# Altium PCB Driver_Modulation.PcbDoc
Units mm, origin at the board's own origin, x right, y up, seen from the top; angles counter-clockwise.
Board outline 152.4 x 101.6 mm, 4 copper layers (Top Layer, Layer 1, Layer 2, Bottom Layer), stack 1.57 mm thick; 114 components, 58 nets, 290 pads, 0 vias.
Unrouted connection lines stored in the file: 153.
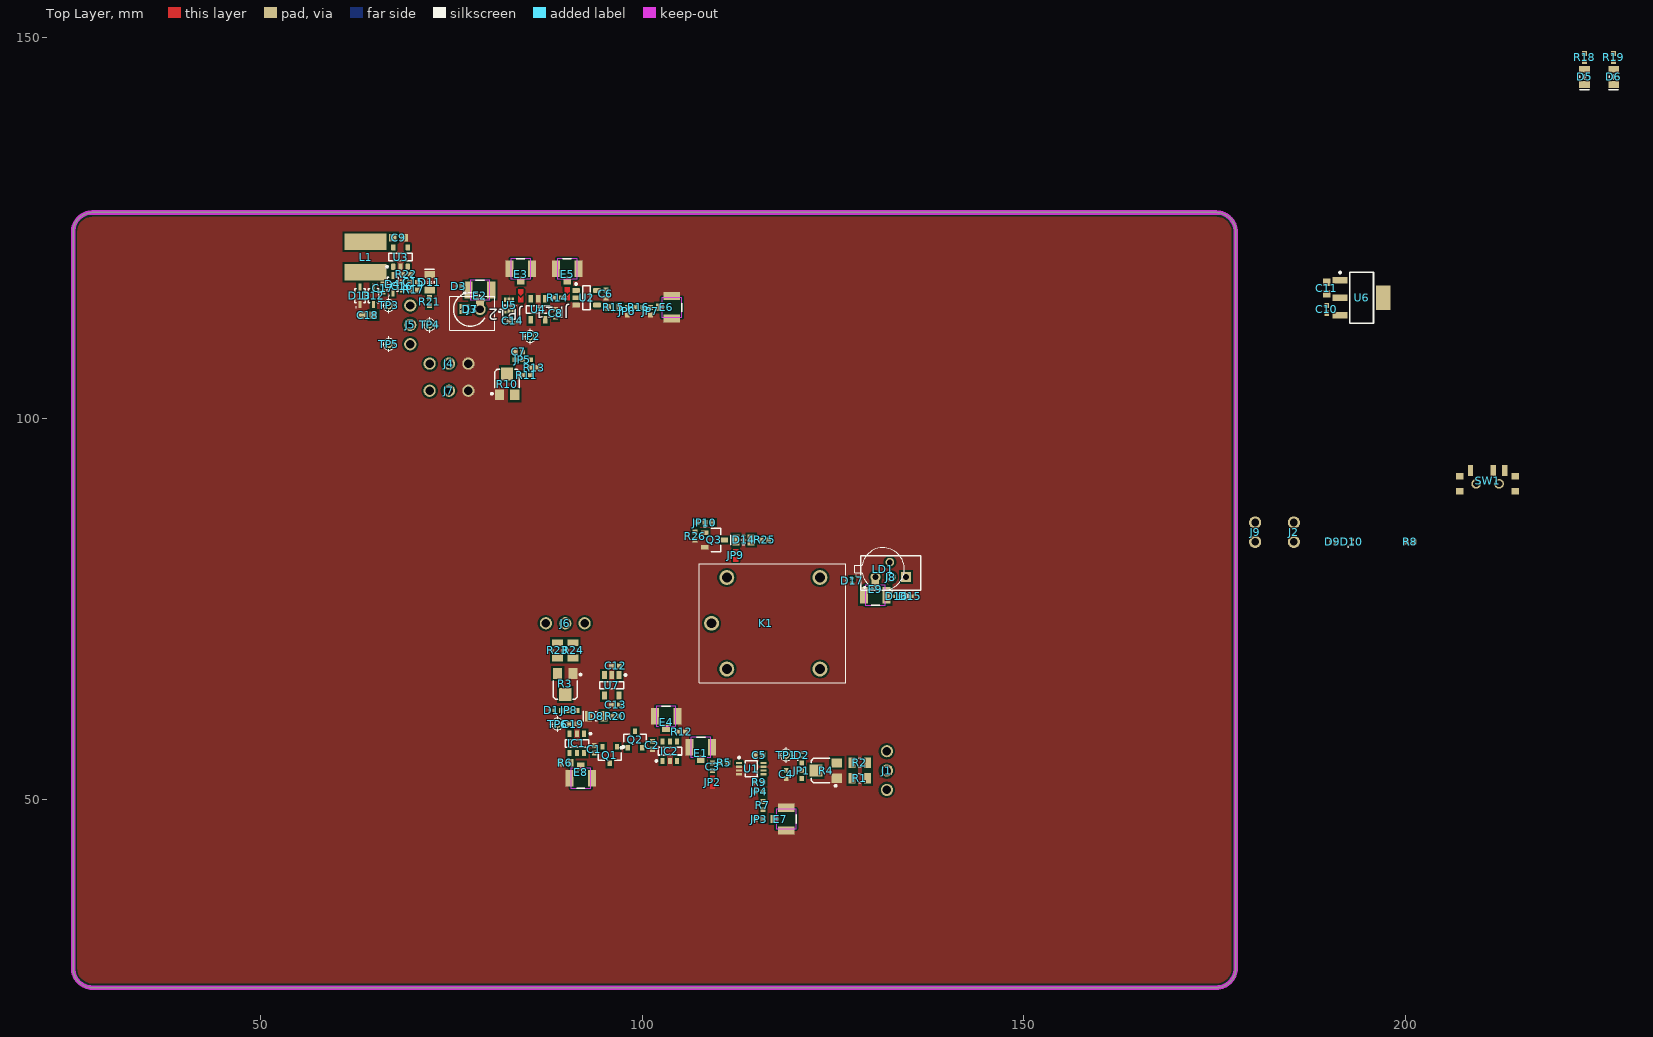
[diagram p0: Top Layer view]
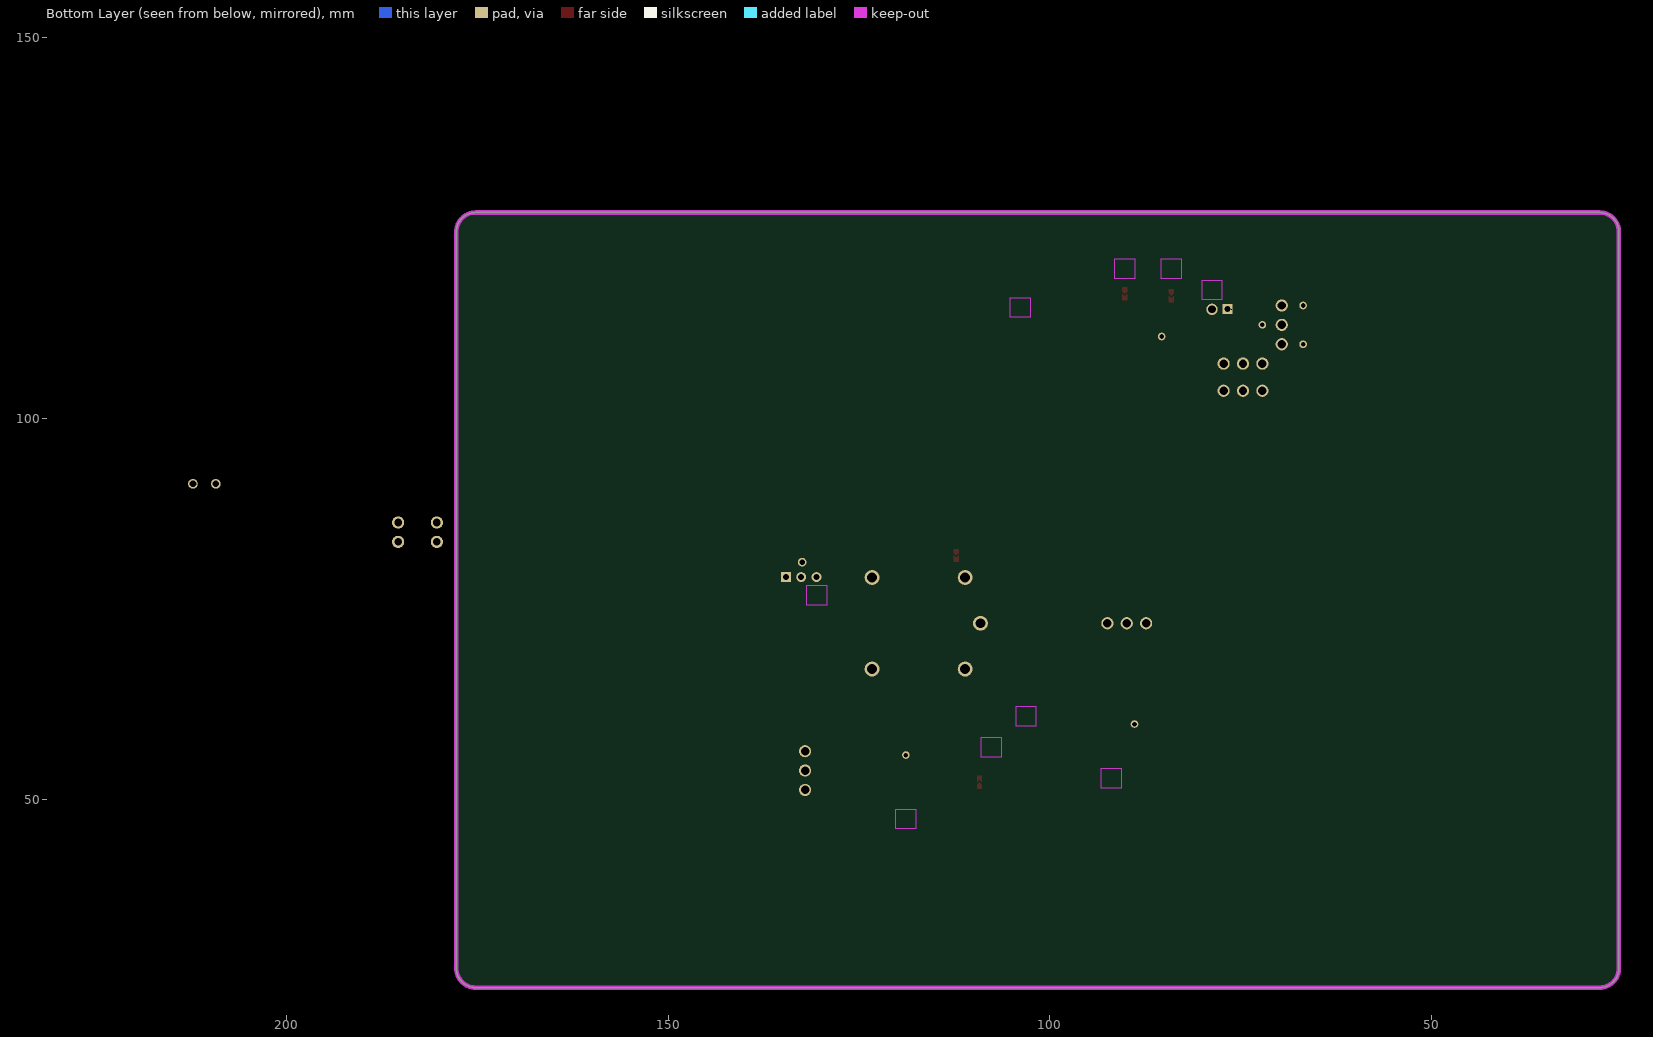
[diagram p1: Bottom Layer view, seen from below]
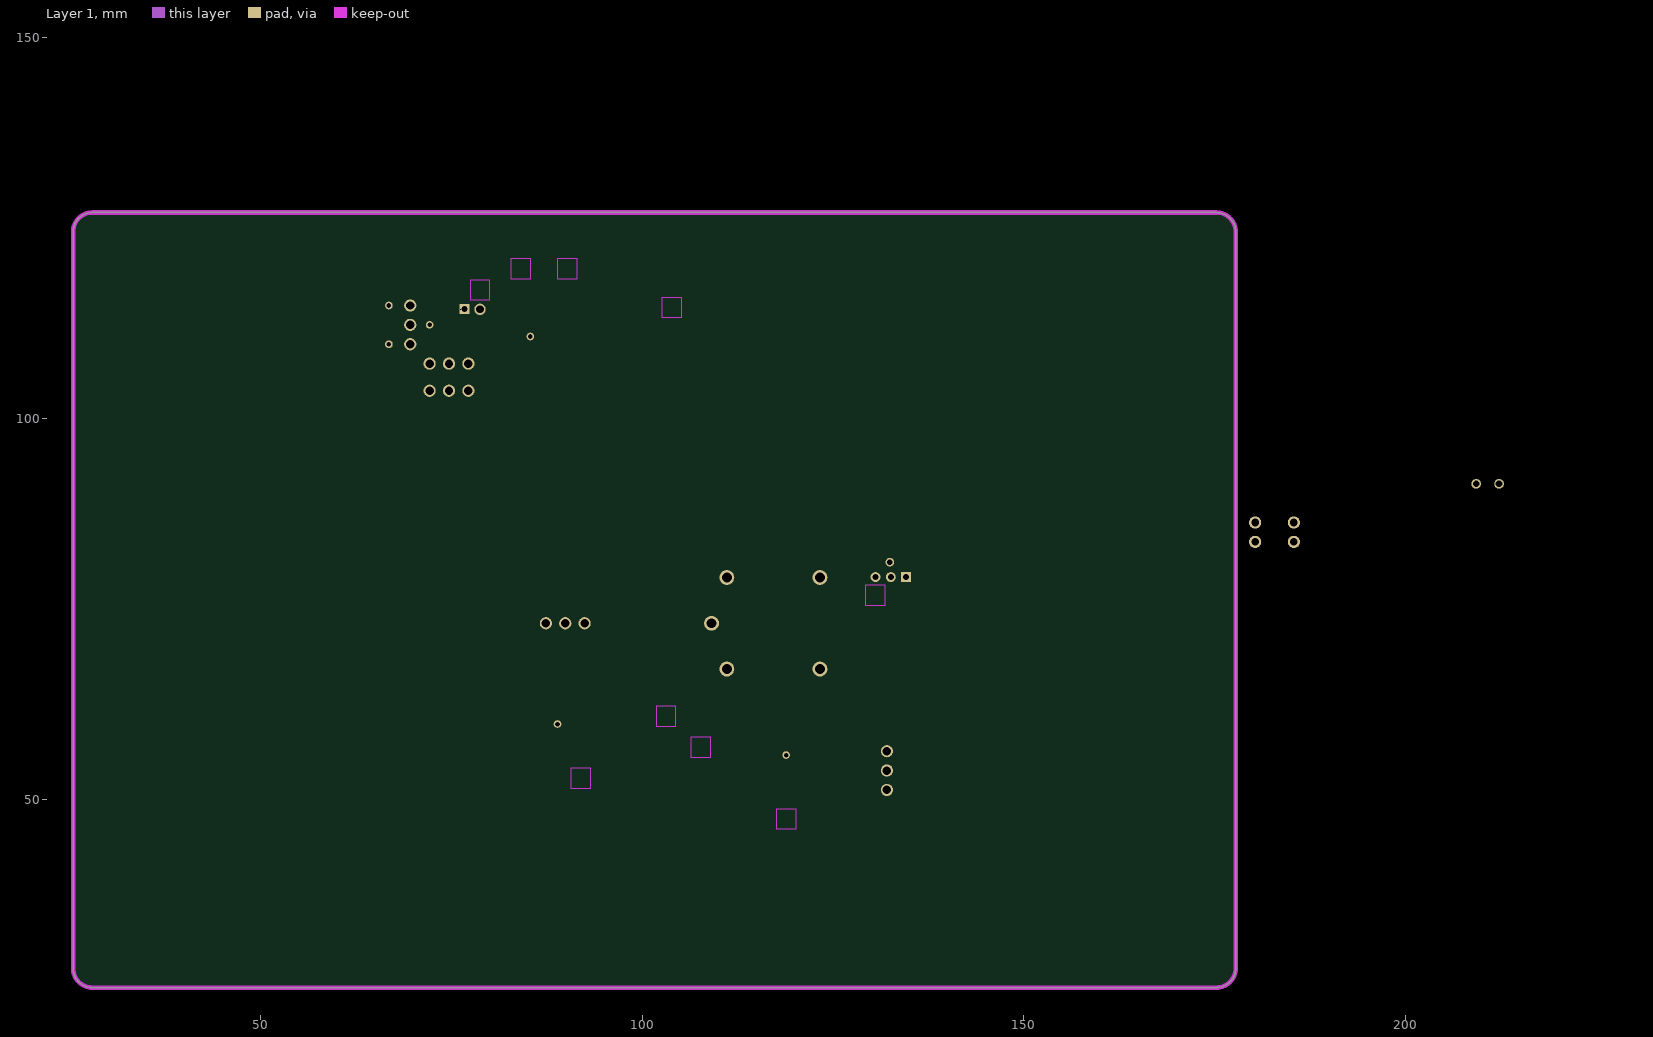
[diagram p2: Layer 1]
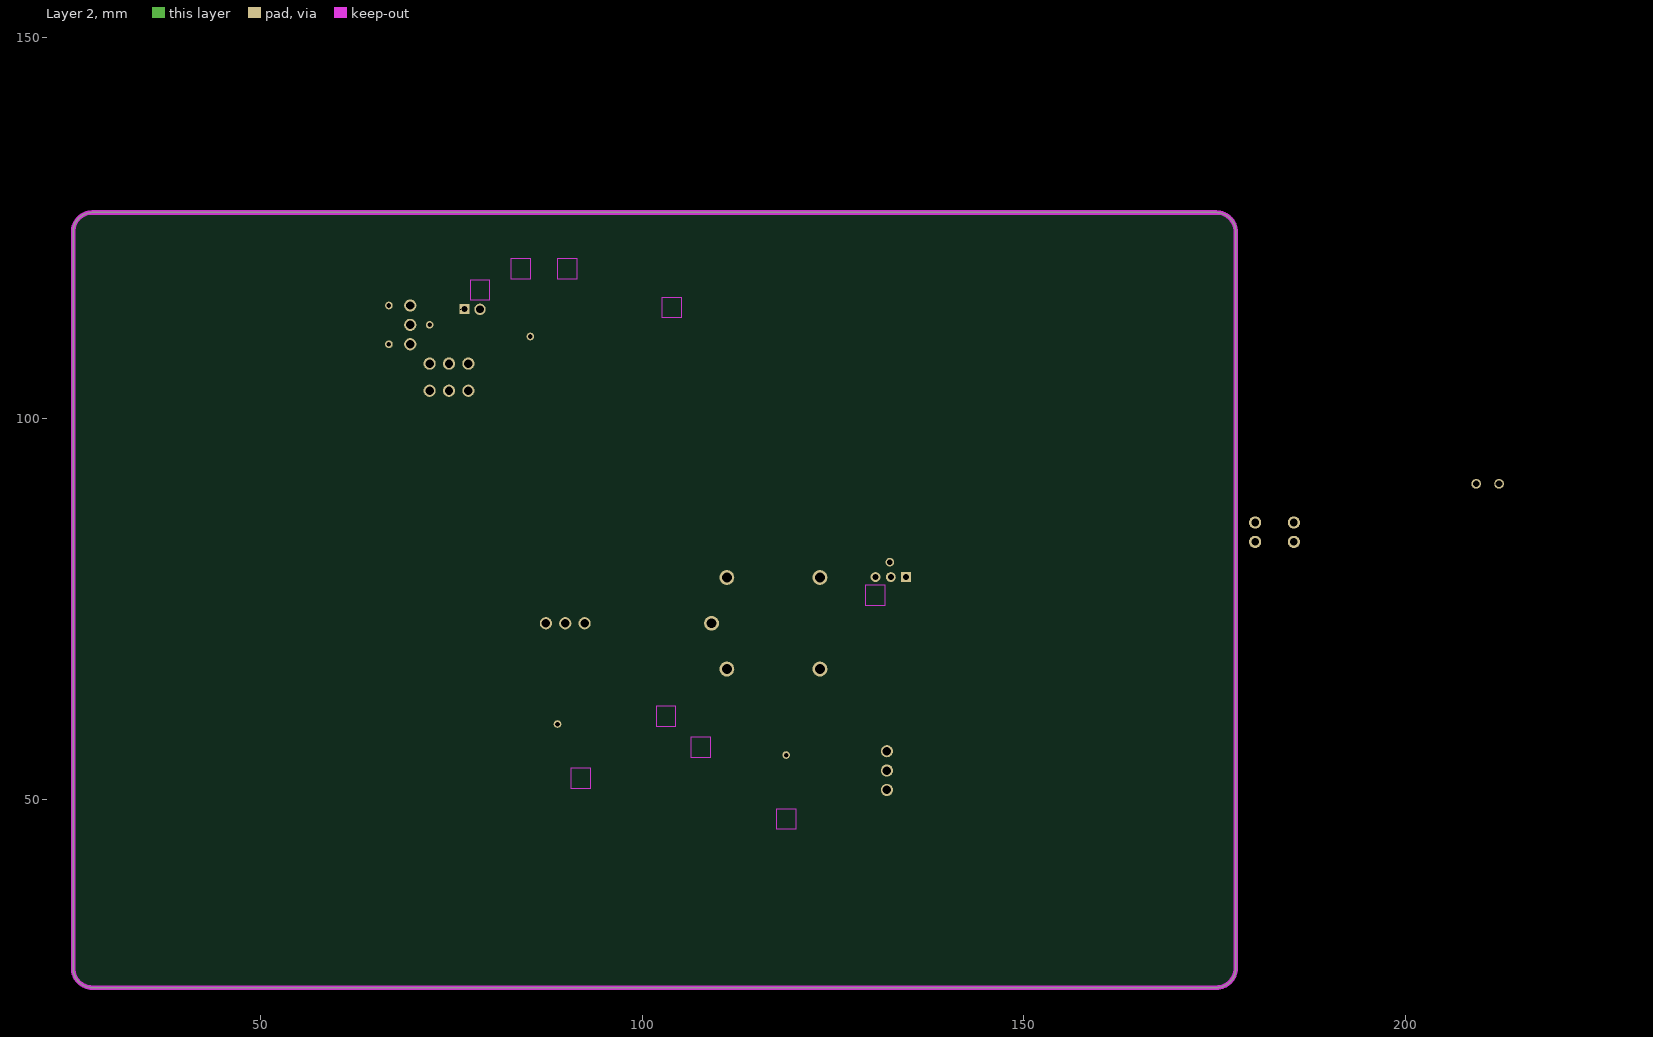
[diagram p3: Layer 2]

## Layer stack, top to bottom
Top Solder: solder mask 0.0203, Polyester, Dk 3.8
Top Layer: signal copper 0.035
Dielectric 2: prepreg 0.2, 7628, Dk 4.6
Layer 1: signal copper 0.0175
Dielectric 1: core 1.065, FR-4, Dk 4.35
Layer 2: signal copper 0.0175
Dielectric 3: prepreg 0.2, 7628, Dk 4.6
Bottom Layer: signal copper 0.035
Bottom Solder: solder mask 0.0203, Polyester, Dk 3.8

## Board outline
25.4,27.94 25.4,124.46 cw(c27.94,124.46) 27.94,127 175.26,127 cw(c175.26,124.46) 177.8,124.46 177.8,27.94 cw(c175.26,27.94) 175.26,25.4 27.94,25.4 cw(c27.94,27.94)

## Design rules (kind name [scope] priority, off if disabled: settings)
Clearance [All] p1: gap=0.254 ignorepadtopadclearanceinfootprint=TRUE except(0: Arc-Hole Track-Hole SMDPad-Hole THPad-Hole Via-Hole Fill-Hole Poly-Hole Region-Hole Text-Hole; 0.127: Arc-Arc Arc-Track Arc-SMDPad Track-Track Track-SMDPad SMDPad-SMDPad)
HoleSize [All] p1: absolutevalues=TRUE maxlimit=6.3 minlimit=0.3 maxpercent=80.000 minpercent=20.000
PlaneConnect [All] p1: planeconnectstyle=Direct reliefexpansion=0.508 reliefentries=4 reliefconductorwidth=0.254 reliefairgap=0.254
PolygonConnect [All] p1: connectstyle=Direct reliefconductorwidth=0.254 reliefentries=4 polygonreliefangle="90 Angle" airgapwidth=0.254
RoutingVias [All] p1: holewidth=0.3 width=0.45 viastyle="Through Hole" minholewidth=0.3 minwidth=0.45 maxholewidth=0.711 maxwidth=1.27
SolderMaskExpansion [All] p1: expansion=0.102 istentingtop=FALSE
SupplyNets "Schematic Supply Nets_16" [InNet('LD_A] p1: voltage=0.000
SupplyNets "Schematic Supply Nets_15" [InNet('LD_A] p2: voltage=0.000
SupplyNets "Schematic Supply Nets_14" [InNet('LD_A] p3: voltage=0.000
SupplyNets "Schematic Supply Nets_13" [InNet('LD_A] p4: voltage=0.000
SupplyNets "Schematic Supply Nets_12" [InNet('LD_A] p5: voltage=0.000
SupplyNets "Schematic Supply Nets_11" [InNet('LD_A] p6: voltage=0.000
SupplyNets "Schematic Supply Nets_10" [InNet('LD_A] p7: voltage=0.000
SupplyNets "Schematic Supply Nets_9" [InNet('LD_A] p8: voltage=0.000
SupplyNets "Schematic Supply Nets_8" [InNet('LD_A] p9: voltage=0.000
SupplyNets "Schematic Supply Nets_7" [InNet('LD_A] p10: voltage=0.000
SupplyNets "Schematic Supply Nets_6" [InNet('GND')] p11: voltage=0.000
SupplyNets "Schematic Supply Nets_5" [InNet('PD_BIAS')] p12: voltage=0.000
SupplyNets "Schematic Supply Nets_4" [InNet('3V3')] p13: voltage=0.000
SupplyNets "Schematic Supply Nets_3" [InNet('LD_A] p14: voltage=0.000
SupplyNets "Schematic Supply Nets_2" [InNet('2V7')] p15: voltage=0.000
SupplyNets "Schematic Supply Nets_1" [InNet('+13V')] p16: voltage=0.000
SupplyNets "Schematic Supply Nets" [InNet('-13V')] p17: voltage=0.000
Width [All] p1: maxlimit=10 minlimit=0.127 preferedwidth=0.2
28 further rules are at their usual default settings.

## Classes and differential pairs
component class U_Alignment_driver: D9 D10 J2 J9 R8 SW1
net class 50R_TRANS: NetJP6_2 NetJP11_2 NetR14_1 NetR15_1
component class U_Power_Regulation: C9 C10 C11 C12 C13 C15 C16 C17 C18 D4 D5 D6 D8 D11 D12 D13 J5 L1 R17 R18 R19 R20 R21 R22 TP3 TP4 TP5 U3 U6 U7
component class U_PD_Receiver_Circuit: C6 C7 C8 C14 D3 D7 E2 E3 E5 J3 J4 J7 JP5 JP6 JP7 JP11 JP12 R10 R11 R13 R14 R15 R16 TP2 U2 U4 U5
component class U_laser: D14 D15 D16 D17 E9 J8 JP9 JP10 K1 LD1 Q3 R25 R26
component class U_Driver_Modulation: C2 C3 C4 C5 D2 E1 E4 IC2 J1 JP1 JP2 JP3 JP4 Q2 R1 R2 R4 R5 R7 R9 R12 TP1 U1
component class U_bias: C1 C19 D1 E8 IC1 J6 JP8 Q1 R3 R6 R23 R24 TP6
component class ROOT: E6 E7

## Components (designator, comment, footprint, x,y, rotation, side; value= is the part's Value field where it differs from the comment)
C1 "CL05B104KB54PNC" CAPC1005X06N 93.726,56.642 r270 top value=100nF
C2 "CL05B104KB54PNC" CAPC1005X06N 101.346,57.15 r90 top value=100nF
C3 "GCM1555C1H1R0JA16D" CAPC1005X06N 109.22,54.356 r90 top value=1pF
C4 "CL05A105KA5NQNC" CAPC1005X06N 118.872,53.34 r90 top value=1µF
C5 "CL05B104KB54PNC" CAPC1005X06N 115.316,55.88 r0 top value=100nF
C6 "CL05B104KB54PNC" CAPC1005X06N 95.25,116.332 r90 top value=100nF
C7 "CL05A105KA5NQNC" CAPC1005X06N 83.82,108.712 r0 top value=1µF
C8 "CL05B104KB54PNC" CAPC1005X06N 88.646,113.792 r270 top value=100nF
C9 "C0603C475K9PACTU" CAPC1608X10N 68.072,123.698 r180 top value=4.7µF
C10 "CL05A106MQ5NUNC" CAPC1005X06N 189.738,114.3 r270 top value=10µF
C11 "CL10A226MQ8NRNC" CAPC1608X10N 189.738,117.094 r270 top value=22µF
C12 "CL05A105KA5NQNC" CAPC1005X06N 96.52,67.564 r0 top value=1µF
C13 "CL05A105KA5NQNC" CAPC1005X06N 96.52,62.484 r0 top value=1µF
C14 "CL05B104KB54PNC" CAPC1005X06N 83.058,112.776 r180 top value=100nF
C15 "CL05C100JB5NNNC" CAPC1005X06N 70.028,117.856 r180 top value=10pF
C16 "CL05A105KA5NQNC" CAPC1005X06N 68.58,117.348 r270 top value=1µF
C17 "CL05A105KA5NQNC" CAPC1005X06N 66.04,117.094 r90 top value=1µF
C18 "CL10A475KO8NNNC" CAPC1608X10N 64.008,113.538 r0 top value=4.7µF
C19 "CL05A105KA5NQNC" CAPC1005X06N 90.932,59.944 r180 top value=1µF
D1 "H5VU10U" DFN60P100X45-2L 88.138,61.722 r180 top value=5V
D2 "H5VU10U" DFN60P100X45-2L 120.904,55.88 r90 top value=5V
D3 "H5VU10U" DFN60P100X45-2L 75.946,117.348 r180 top value=5V
D4 "1N5819WS" SODFL250X100-2N 67.31,117.602 r90 top
D5 "KT-0805Y" LED_0805 223.52,144.78 r90 top
D6 "KT-0805Y" LED_0805 227.33,144.78 r90 top
D7 "SFH 203 P" SFH203P 77.47,114.3 r180 top
D8 "KT-0805Y" LED_0805 93.98,60.96 r0 top
D9 "H5VU10U" DFN60P100X45-2L 190.5,83.82 r0 top value=5V
D10 "H5VU10U" DFN60P100X45-2L 193.04,83.82 r90 top value=5V
D11 "KT-0805Y" LED_0805 72.136,117.856 r270 top
D12 "1N5819WS" SODFL250X100-2N 64.77,116.078 r270 top
D13 "1N5819WS" SODFL250X100-2N 62.992,116.078 r90 top
D14 "KT-0805G" LED_0805 113.284,84.074 r0 top
D15 "H5VU10U" DFN60P100X45-2L 135.128,76.708 r0 top value=5V
D16 "H5VU10U" DFN60P100X45-2L 133.35,76.708 r0 top value=5V
D17 "H5VU10U" DFN60P100X45-2L 127.508,78.74 r270 top value=5V
E1 "U.FL-R-SMT-1(01)" "HRS-U.FL-R-SMT-3_V 4_LAYER_KO" 107.696,56.896 r0 top
E2 "U.FL-R-SMT-1(01)" "HRS-U.FL-R-SMT-3_V 4_LAYER_KO" 78.74,116.84 r0 top
E3 "U.FL-R-SMT-1(01)" "HRS-U.FL-R-SMT-3_V 4_LAYER_KO" 84.074,119.634 r0 top
E4 "U.FL-R-SMT-1(01)" "HRS-U.FL-R-SMT-3_V 4_LAYER_KO" 103.124,60.96 r0 top
E5 "U.FL-R-SMT-1(01)" "HRS-U.FL-R-SMT-3_V 4_LAYER_KO" 90.17,119.634 r0 top
E6 "U.FL-R-SMT-1(01)" "HRS-U.FL-R-SMT-3_V 4_LAYER_KO" 103.886,114.554 r270 top
E7 "U.FL-R-SMT-1(01)" "HRS-U.FL-R-SMT-3_V 4_LAYER_KO" 118.872,47.498 r270 top
E8 "U.FL-R-SMT-1(01)" "HRS-U.FL-R-SMT-3_V 4_LAYER_KO" 91.948,52.832 r180 top
E9 "U.FL-R-SMT-1(01)" "HRS-U.FL-R-SMT-3_V 4_LAYER_KO" 130.556,76.835 r180 top
IC1 "OPA355NA/3K" DBV0006A_SOT-23-6_TI__SOT95P280X145-6L 91.44,57.404 r270 top
IC2 "OPA355NA/3K" DBV0006A_SOT-23-6_TI__SOT95P280X145-6L 103.632,56.388 r90 top
J1 "10129378-903001BLF" 10129378-903001BLF-Footprint-1 132.08,51.308 r90 top
J2 "Alt. Switch Connection" 22-28-4020-Footprint-1 185.42,83.82 r90 top
J3 "B2B-PH-K-S(LF)(SN)" JST_B2B-PH-K-S(LF)(SN) 77.724,113.792 r180 top
J4 "10129378-903001BLF" 10129378-903001BLF-Footprint-1 77.216,107.188 r180 top
J5 "10129378-903001BLF" 10129378-903001BLF-Footprint-1 69.596,109.728 r90 top
J6 "10129378-903001BLF" 10129378-903001BLF-Footprint-1 87.376,73.152 r0 top
J7 "10129378-903001BLF" 10129378-903001BLF-Footprint-1 77.216,103.632 r180 top
J8 "B3B-PH-K-S(LF)(SN)" JST-B3B-PH-K-S-3_V 132.588,79.756 r180 top
J9 "LD Connection" 22-28-4020-Footprint-1 180.34,83.82 r90 top
JP1 "JUMPER-0402 TWO STATE" "RESC1005X04N TWO STATE" 120.904,54.356 r90 top value=0
JP2 "JUMPER-0402" JUMPER-0402-Footprint-1 109.22,52.324 r90 top value=0
JP3 "JUMPER-0402" RESC1005X04N 115.316,47.498 r0 top value=0
JP4 "JUMPER-0402" RESC1005X04N 115.316,51.054 r0 top value=0
JP5 "JUMPER-0402 TWO STATE" "RESC1005X04N TWO STATE" 84.836,107.696 r0 top value=0
JP6 "JUMPER-0402" RESC1005X04N 98.044,114.046 r90 top value=0
JP7 "JUMPER-0402" RESC1005X04N 101.092,114.046 r90 top value=0
JP8 "JUMPER-0402 TWO STATE" "RESC1005X04N TWO STATE" 89.916,61.722 r180 top value=0
JP9 "ERJ-2GE0R00X" JUMPER_RESC1005X04N 112.268,82.042 r270 top value=0
JP10 "JUMPER-0402 TWO STATE" "RESC1005X04N TWO STATE" 108.712,86.36 r0 top value=0
JP11 "JUMPER-0402" JUMPER-0402-Footprint-1 90.17,116.332 r270 top value=0
JP12 "JUMPER-0402" JUMPER-0402-Footprint-1 84.074,116.078 r270 top value=0
K1 "SRD-03VDC-SL-C" SRD-03VDC-SL-C-Footprint-1 117.094,73.152 r0 top
L1 "PCD0504MT470" INDP5252X48L 63.754,121.158 r270 top value=47µH
LD1 "OPV314Y" TO-18 131.572,80.264 r45 top
Q1 "2SC3356" SOT-23_hongjiacheng__SOT95P240X115-3L 95.758,55.88 r270 top
Q2 "2SC3356" SOT-23_hongjiacheng__SOT95P240X115-3L 99.06,57.912 r90 top
Q3 "MDD2302" SOT95P252X140-3N 109.474,84.074 r0 top
R1 "0805W8F7502T5E" RESC2012X05N 128.524,52.832 r0 top value=75k
R2 "0805W8F7501T5E" RESC2012X05N 128.524,54.864 r0 top value=7.5k
R3 "TC33X-2-103E" BOUR-TC33X-2_V 89.916,65.024 r270 top value=10k
R4 "TC33X-2-103E" BOUR-TC33X-2_V 123.952,53.848 r180 top value=10k
R5 "0402WGF0000TCE" RESC1005X04N 110.744,54.864 r0 top value=0
R6 "ERJ-3GEYJ270V" RESC1608X05N 89.916,54.864 r0 top value=27
R7 "0402WGF0000TCE" RESC1005X04N 115.824,49.276 r270 top value=0
R8 "0402WGF1000TCE" RESC1005X04N 200.66,83.82 r0 top value=100
R9 "0402WGF499JTCE" RESC1005X04N 115.316,52.324 r0 top value=49.9
R10 "TC33X-2-103E" BOUR-TC33X-2_V 82.296,104.648 r90 top value=10k
R11 "0402WGF2702TCE" RESC1005X04N 84.836,105.664 r180 top value=27k
R12 "0402WGF1000TCE" RESC1005X04N 105.156,58.928 r180 top value=100
R13 "0402WGF5601TCE" RESC1005X04N 85.852,106.68 r180 top value=5.6k
R14 "0402WGF499JTCE" RESC1005X04N 88.9,115.824 r0 top value=49.9
R15 "0603WAF200JT5E" RESC1608X05N 96.266,114.554 r0 top value=20
R16 "0402WGF0000TCE" RESC1005X04N 99.568,114.554 r180 top value=0
R17 "0402WGF1004TCE" RESC1005X04N 70.028,116.84 r0 top value=1M
R18 "0402WGF5101TCE" RESC1005X04N 223.52,147.32 r90 top value=5.1k
R19 "CRCW04021K00FKEDC" RESC1005X04N 227.33,147.32 r90 top value=1k
R20 "CRCW04021K00FKEDC" RESC1005X04N 96.52,60.96 r0 top value=1k
R21 "CRCW0402-10K0FKED" RESC1005X04N 72.136,115.316 r270 top value=10k
R22 "CRCW0402100KFKEDC" RESC1005X04N 69.088,118.872 r180 top value=100k
R23 "0805W8F1503T5E" RESC2012X05N 88.9,69.596 r90 top value=150k
R24 "0805W8F1002T5E" RESC2012X05N 90.932,69.596 r90 top value=10k
R25 "CRCW04021K00FKEDC" RESC1005X04N 116.078,84.074 r0 top value=1k
R26 "CRCW0402100KFKEDC" RESC1005X04N 106.934,84.582 r90 top value=100k
SW1 "PCM12SMTR" PCM12SMTR-Footprint-1 210.82,91.44 r0 top
TP1 "Test Point" "Test Point-Footprint-1" 118.872,55.88 r0 top
TP2 "Test Point" "Test Point-Footprint-1" 85.344,110.744 r90 top
TP3 "Test Point" "Test Point-Footprint-1" 66.802,114.808 r90 top
TP4 "Test Point" "Test Point-Footprint-1" 72.136,112.268 r90 top
TP5 "Test Point" "Test Point-Footprint-1" 66.802,109.728 r90 top
TP6 "Test Point" "Test Point-Footprint-1" 88.9,59.944 r0 top
U1 "SN74AUC2G53DCUR" DCU0008A_N 114.3,54.102 r0 top value=15Ω
U2 "SN74LVC1G14DBVR" DBV0005A_N 92.71,115.824 r0 top
U3 "TPS61040DBVR" DBV0005A_L 68.326,121.158 r90 top
U4 "TLV3601DCKR" SOT95P280X145-5N 86.36,114.3 r270 top
U5 "LMH34400IDRLR" SOTFL50P160X60-6N 82.55,114.808 r90 top
U6 "AMS1117-3.3" 1117_REG_SOT223__SOT230P700X180-4L 194.31,115.824 r0 top
U7 "NCP114ASN270T1G" SOT95P280X110-5N 96.012,65.024 r270 top

## Footprints (in the part's own frame and the unit in brackets; to place one, negate y for a bottom-side part, rotate by r counter-clockwise, add the part's x,y. Pads: shape width x height; smd on the part's side, far side on the other; paste and mask are expansions set on the pad)
22-28-4020-Footprint-1 [mm]
  round 1.6 hole 1: 1(0,0) 2(2.54,0)
  body extent -1.27,-1.27 3.81,1.23, height 8.38
1117_REG_SOT223__SOT230P700X180-4L [mm] "SOT223 for AMS/NCP/TLV1117x regulators SOT223, 4-Leads, Body 6.50x7.00mm (avg), Pitch 2.30mm, IPC High Density"
  rect 1.95x0.9 smd: 1(-2.825,2.3) 2(-2.825,0) 3(-2.825,-2.3)
  rect 1.95x3.2 smd: 4(2.825,0)
  silkscreen extent -2.95,-3.35 1.55,3.42, body extent -3.5,-3.35 3.5,3.35, height 1.8
10129378-903001BLF-Footprint-1 [mm]
  round 1.6 hole 1.1: 1(0,0) 2(2.54,0) 3(5.08,0)
  body extent -1.27,-1.23 6.35,1.27, height 8.38
BOUR-TC33X-2_V [mm] "SMD, 3-Leads, Body 3.8x3.6mm"
  rect 1.4x1.2 smd: 1(-1.55,1) 3(-1.55,-1)
  rect 1.7x1.6 smd: 2(1.2,0)
  silkscreen extent -1.52,-1.6 1.8,2.13, body extent -2.01,-1.5 1.8,1.5, height 1.21
CAPC1005X06N [mm] "Chip Capacitor, 2-Leads, Body 1.00x0.50mm, IPC Medium Density"
  rect 0.66x0.62 smd: 1(-0.508,0) 2(0.508,0)
  body extent -0.53,-0.28 0.53,0.28, height 0.55
CAPC1608X10N [mm] "Chip Capacitor, 2-Leads, Body 1.60x0.80mm, IPC Medium Density"
  rect 1x1 smd: 1(-0.75,0) 2(0.75,0)
  body extent -0.87,-0.48 0.87,0.48, height 0.95
DBV0005A_L [mm] "SOT23, 5-Leads, Body 3.05x1.75mm, Pitch 0.95mm, IPC High Density"
  rrect18% 0.8x0.55 smd: 1(-1.275,0.95) 2(-1.275,0) 3(-1.275,-0.95) 4(1.275,-0.95) 5(1.275,0.95)
  silkscreen extent -1.4,-1.55 0.5,1.9, body extent -1.42,-1.46 1.42,1.46, height 1.08
DBV0005A_N [mm] "SOT23, 5-Leads, Body 3.05x1.75mm, Pitch 0.95mm, IPC Medium Density"
  rrect17% 1x0.6 smd: 1(-1.375,0.95) 2(-1.375,0) 3(-1.375,-0.95) 4(1.375,-0.95) 5(1.375,0.95)
  silkscreen extent -1.5,-1.55 0.5,1.92, body extent -1.42,-1.46 1.42,1.46, height 1.08
DBV0006A_SOT-23-6_TI__SOT95P280X145-6L [mm] "SOT23, 6-Leads, Body 2.90x2.80mm, Pitch 0.95mm, IPC High Density"
  rect 0.8x0.55 smd: 1(-1.275,0.95) 2(-1.275,0) 3(-1.275,-0.95) 4(1.275,-0.95) 5(1.275,0) 6(1.275,0.95)
  silkscreen extent -1.4,-1.55 0.5,1.9, body extent -1.5,-1.53 1.5,1.53, height 1.45
DCU0008A_N [mm] "SOP, 8-Leads, Body 2.4x2.1mm, Pitch 0.5mm, IPC Medium Density"
  rrect33% 0.8x0.3 smd: 1(-1.6,0.75) 2(-1.6,0.25) 3(-1.6,-0.25) 4(-1.6,-0.75) 5(1.6,-0.75) 6(1.6,-0.25) 7(1.6,0.25) 8(1.6,0.75)
  silkscreen extent -1.72,-1.05 0.8,1.57, body extent -1.56,-1 1.56,1, height 0.9
DFN60P100X45-2L [mm] "DFN, 2-Leads, Body 0.60x1.00mm, Pitch 0.60mm, IPC High Density"
  rect 0.35x0.5 smd: 1(-0.3,0) 2(0.3,0)
  silkscreen extent -0.68,0.46 -0.59,0.56, body extent -0.53,-0.33 0.53,0.33, height 0.45
"HRS-U.FL-R-SMT-3_V 4_LAYER_KO" [mm] "SMT, 3-Leads, Body 2.6x2.6mm 4_LAYER_KO"
  rect 1x1.05 smd: 1(0,-1.525)
  rect 1.05x2.2 smd: 2(-1.475,0) 2(1.475,0)
  Top Layer keep-out region: -1.3,-1.3 1.3,-1.3 1.3,1.3 -1.3,1.3
  Layer 1 keep-out region: -1.3,-1.3 1.3,-1.3 1.3,1.3 -1.3,1.3
  Layer 2 keep-out region: -1.3,-1.3 1.3,-1.3 1.3,1.3 -1.3,1.3
  Bottom Layer keep-out region: -1.3,-1.3 1.3,-1.3 1.3,1.3 -1.3,1.3
  silkscreen extent -0.55,1.3 0.55,1.3, body extent -1.5,-1.5 1.5,1.3, height 1.24
INDP5252X48L [mm] "Precision Wire Wound Inductor, 2-Leads, Body 5.20x5.20mm, IPC High Density"
  rect 2.15x5.5 smd: 1(-2,0) 2(2,0)
  body extent -2.7,-2.6 2.7,2.6, height 4.9
JST-B3B-PH-K-S-3_V [mm] "Connector, 3-Leads, Body 7.9x4.5mm, Pitch 2mm"
  rect 1.3x1.3 hole 0.8: 1(-2,0.55)
  round 1.3 hole 0.8: 2(0,0.55) 3(2,0.55)
  silkscreen extent -3.95,-2.25 3.95,3.4, body extent -3.95,-2.25 3.95,2.25, height 6
JST_B2B-PH-K-S(LF)(SN) [mm]
  rect 1.308x1.308 hole 0.8: 1(1,-0.55)
  round 1.308 hole 0.8: 2(-1,-0.55)
  silkscreen extent -2.95,-2.77 2.95,2.25, body extent -2.95,-2.25 2.95,2.25, height 6
JUMPER-0402-Footprint-1 [mil]
  round 1 smd paste-99999 mask+0: 1(-16.5,0) 2(16.4,0)
  Top Layer region: -0.2,-12.2 33,-12.2 33,12.2 -0.2,12.2 12,0
  Top Layer region: -32.99,-12.2 -32.99,12.2 -12.2,12.2 0,0 -12.2,-12.2
  body extent -21,-11 21,11, height 16
JUMPER_RESC1005X04N [mil] "Chip Resistor, 2-Leads, Body 1.00x0.50mm, IPC Medium Density"
  round 1 smd paste-99999 mask+0: 1(-16.5,0) 2(16.4,0)
  Top Layer region: -32.99,-12.2 -32.99,12.2 -12.2,12.2 0,0 -12.2,-12.2
  Top Layer region: -0.2,-12.2 33,-12.2 33,12.2 -0.2,12.2 12,0
  body extent -21,-11 21,11, height 16
LED_0805 [mm] "Chip LED, 2-Leads, Body 0805, IPC Medium Density"
  rect 0.9x1.4 smd: 1(-1,0) 2(1,0)
  silkscreen extent -1.7,-0.64 0.35,0.63, body extent -1,-0.63 1,0.63, height 0.71
PCM12SMTR-Footprint-1 [mil]
  rect 39x32 smd: 0(-143.5,-38.5) 0(-143.5,38.5) 0(143.5,-38.5) 0(143.5,38.5)
  round 50 hole 35: 0(-59,0) 0(59,0)
  rect 28x59 smd: 1(-88.5,68.5) 2(29.5,68.5) 3(88.5,68.5)
  body extent -145,-92 145,88, height 55
RESC1005X04N [mm] "Chip Resistor, 2-Leads, Body 1.00x0.50mm, IPC Medium Density"
  rect 0.66x0.62 smd: 1(-0.508,0) 2(0.508,0)
  body extent -0.53,-0.28 0.53,0.28, height 0.4
"RESC1005X04N TWO STATE" [mm] "Chip Resistor, 2-Leads, Body 1.00x0.50mm, IPC Medium Density"
  rect 0.66x0.62 smd: 1(-1.524,0) 2(0.508,0) 3(-0.508,0)
  body extent -1.54,-0.28 0.53,0.28, height 0.4
RESC1608X05N [mm] "Chip Resistor, 2-Leads, Body 1.58x0.85mm, IPC Medium Density"
  rect 0.7x0.95 smd: 1(-0.7,0) 2(0.7,0)
  body extent -0.82,-0.48 0.82,0.48, height 0.5
RESC2012X05N [mm] "Chip Resistor, 2-Leads, Body 2.05x1.25mm, IPC Medium Density"
  rect 0.9x1.4 smd: 1(-1,0) 2(1,0)
  silkscreen extent -0.15,-0.6 0.15,0.6, body extent -1.1,-0.7 1.1,0.7, height 0.5
SFH203P [mm] "PIN Photodiode"
  round 1.5 hole 1 mask+0.1: 1(-1.27,0)
  round 0.051 hole 0.025 mask+0.1: 2(1.27,0)
  silkscreen extent -1.88,-2.2 2.2,2.2, body extent -1.87,-1.95 1.95,1.95, height 10.5
SODFL250X100-2N [mm] "SODFL, 2-Leads, Body 1.30x2.50mm, IPC Medium Density"
  rect 0.95x0.4 smd: 1(-1.125,0) 2(1.125,0)
  silkscreen extent -1.55,-0.7 0.9,0.7, body extent -1.25,-0.7 1.25,0.7, height 1
SOT95P252X140-3N [mm] "SOT23, 3-Leads, Body 2.95x2.53mm, Pitch 0.95mm, IPC Medium Density"
  rect 0.95x0.6 smd: 1(-1.275,0.95) 2(-1.275,-0.95) 3(1.275,0)
  silkscreen extent -1.4,-1.55 0.8,1.92, body extent -1.5,-1.55 1.5,1.55, height 1.4
SOT95P280X110-5N [mm] "SOT23, 5-Leads, Body 3.00x2.80mm, Pitch 0.95mm, IPC Medium Density"
  rect 1.05x0.6 smd: 1(-1.35,0.95) 2(-1.35,0) 3(-1.35,-0.95) 4(1.35,-0.95) 5(1.35,0.95)
  silkscreen extent -1.47,-1.6 0.45,1.93, body extent -1.5,-1.58 1.5,1.58, height 1.1
SOT95P280X145-5N [mm] "SOT23, 5-Leads, Body 2.90x2.80mm, Pitch 0.95mm, IPC Medium Density"
  rect 1x0.6 smd: 1(-1.375,0.95) 2(-1.375,0) 3(-1.375,-0.95) 4(1.375,-0.95) 5(1.375,0.95)
  silkscreen extent -1.5,-1.55 0.5,1.93, body extent -1.5,-1.53 1.5,1.53, height 1.45
SOT-23_hongjiacheng__SOT95P240X115-3L [mm] "SOT23, 3-Leads, Body 2.90x2.40mm, Pitch 0.95mm, IPC High Density"
  rect 0.75x0.55 smd: 1(-1.075,0.95) 2(-1.075,-0.95) 3(1.075,0)
  silkscreen extent -1.2,-1.5 0.7,1.9, body extent -1.28,-1.5 1.28,1.5, height 1.15
SOTFL50P160X60-6N [mm] "SOTFL, 6-Leads, Body 1.60x1.60mm, Pitch 0.50mm, IPC Medium Density"
  rect 0.65x0.35 smd: 1(-0.75,0.5) 2(-0.75,0) 3(-0.75,-0.5) 4(0.75,-0.5) 5(0.75,0) 6(0.75,0.5)
  silkscreen extent -0.87,-0.85 0.05,1.35, body extent -0.8,-0.85 0.8,0.85, height 0.6
SRD-03VDC-SL-C-Footprint-1 [mm]
  round 1.95 hole 1.3: COIL1(-6,6) COIL2(-6,-6) COM(-8,0) NC(6.2,6) NO(6.2,-6)
  silkscreen extent -9.6,-7.8 9.6,7.8, body extent -9.6,-7.8 9.6,7.8, height 15.8
"Test Point-Footprint-1" [mm]
  round 1 hole 0.6 mask+0: 1(0,0)
  silkscreen extent -1.02,-1.02 1.02,1.02
TO-18 [mil]
  rect 2x2 hole 1: 1(-50,0)
  round 2 hole 1: 2(0,-50)
  round 44.49 hole 28.74: 3(50,0)
  silkscreen extent -138,-110 110,118, body extent -119,-110 109,119, height 210

## Part data
C1 C2 C5 C6 C8 C14: library part CMP-00074-10, "Ceramic Capacitor, Multilayer, Ceramic, 50V, 10% +Tol, 10% -Tol, X7R, 15% TC, 0.1uF, Surface Mount, 0402", Case Code (Imperial)=0402, Dielectric=X7R, JLC_PN=C307331, Tolerance=10%, Voltage Rating=50V, RoHS Compliant=Yes, Source=JLCPCB(Basic)
C3: library part CMP-00086-4, "Cap Ceramic 1pF 50V C0G 5% Pad SMD 0402 125C Automotive T/R", Case Code (Imperial)=0402, Dielectric=C0G, JLC_PN=C1550, Tolerance=5%, Voltage Rating=50V, RoHS Compliant=Unsure, Source=JLCPCB(Basic)
C4 C7 C12 C13 C16 C17 C19: library part CMP-00190-9, "Ceramic Capacitor, Multilayer, Ceramic, 25V, 10% +Tol, 10% -Tol, X5R, 15% TC, 1uF, Surface Mount, 0402", Case Code (Imperial)=0402, Dielectric=X5R, JLC_PN=C52923, Tolerance=10%, Voltage Rating=25V, RoHS Compliant=Yes, Source=JLCPCB(Basic)
C9: library part CMP-00044-3, "KEMET - C0603C475K9PACTU - SMD Multilayer Ceramic Capacitor, 4.7 µF, 6.3 V, 0603 [1608 Metric], ± 10%, X5R, C Series KEMET", Case Code (Imperial)=0603, Dielectric=X5R, JLC_PN=C19666, Tolerance=10%, Voltage Rating=6.3V, RoHS Compliant=Unsure, Source=JLCPCB(Basic)
C10: library part CMP-00663-2, "Cap Ceramic 10uF 6.3V X5R 20% SMD 0402 85°C Paper T/R", Case Code (Imperial)=0402, Dielectric=X5R, JLC_PN=C15525, Tolerance=20%, Voltage Rating=6.3V, RoHS Compliant=Yes, Source=JLCPCB(Basic)
C11: library part CMP-00700-2, "Multilayer Ceramic Capacitor, 22 uF, 6.3 V, ± 20%, X5R, 0603 [1608 Metric]", Case Code (Imperial)=0603, Dielectric=X5R, JLC_PN=C59461, Tolerance=20%, Voltage Rating=6.3V, RoHS Compliant=Yes, Source=JLCPCB(Basic)
C15: library part CMP-00653-3, "Multilayer Ceramic Capacitor, 10 pF, 50 V, ± 5%, C0G (NP0), 0402 [1005 Metric]", Case Code (Imperial)=0402, Dielectric=C0G, JLC_PN=C32949, Tolerance=5%, Voltage Rating=50V, RoHS Compliant=Yes, Source=JLCPCB(Basic)
C18: library part CMP-00044-4, "16V 4.7uF X5R ±10% 0603 Multilayer Ceramic Capacitors MLCC - SMD/SMT ROHS", Case Code (Imperial)=0603, Dielectric=X5R, JLC_PN=C19666, Tolerance=10%, Voltage Rating=16V, RoHS Compliant=Unsure, Source=JLCPCB(Basic)
D1 D2 D3 D9 D10 D15 D16 D17: library part CMP-00841-4, "5A 55W 16V 9V Unidirectional 5V DFN1006-2L  ESD and Surge Protection (TVS/ESD) ROHS", Breakdown Voltage=9V, Capacitance=0.8pF, Clamping Voltage=16V, JLC_PN=C22395519, Package=DFN1006-2L, Peak Pulse Power Dissipation=55W, Polarity=Unidirectional, RoHS Compliant=Unsure, Source=JLCPCB(Basic)
D4 D12 D13: library part CMP-00680-5, "VR=40V IF=1A 120pF P=250mW", Case/Package=SOD-323, Forward Current=1A, Forward Voltage=600mV, JLC_PN=C191023, Max Forward Surge Current (Ifsm)=25A, Max Repetitive Reverse Voltage (Vrrm)=40V, Max Reverse Current=500µA, Power Dissipation=1.5W, RoHS Compliant=Unsure, Source=JLCPCB(Basic), Technology=SCHOTTKY
D5 D6 D8 D11: library part CMP-00852-3, "Yellow 0805 LED Indication - Discrete ROHS", Case Code (Imperial)=0805, Color=Yellow, Forward Voltage=2.2V, JLC_PN=C2296, Luminous Intensity=113mcd, RoHS Compliant=Unsure, Source=JLCPCB(Basic), Wavelength=594nm
D7: library part CMP-111-000002-1, "Photodiode PIN Chip 850nm 0.62A/W Sensitivity 2-Pin T-1 3/4", Case/Package=Radial, Dark Current=5nA, Forward Current=80mA, Forward Voltage=1.3V, Max Forward Surge Current (Ifsm)=0A, Max Operating Temperature=100°C, Max Power Dissipation=150mW, Max Repetitive Reverse Voltage (Vrrm)=0V, Max Reverse Voltage (DC)=50V, Min Operating Temperature=-40°C, Reverse Voltage=20V, Contact Plating=Tin, Diode Type=PIN, Fall Time=5ns, Height=4.6mm, Length=5.7mm, Max Reverse Current=0A, Mounting Technology="Through Hole", Number of Circuits=1, Peak Wavelength=850nm, Pins=2, Power Dissipation=150mW, Response Time=5ns, Reverse Breakdown Voltage=50V, Reverse Voltage (DC)=50V, Rise Time=5ns, RoHS=Compliant, RoHS Compliant=Unsure, Shape=Square, Source=JLCPCB(Extended,Economic_PCBA), Technology=0, Viewing Angle=150°, Wavelength=850nm, Width=5.7mm
D14: library part CMP-00712-3, "Emerald 0805  Light Emitting Diodes (LED) ROHS green", Case Code (Imperial)=0805, Color=Emerald, Forward Voltage=2.8V, JLC_PN=C2297, RoHS Compliant=Unsure, Source=JLCPCB(Basic), Wavelength=520nm
E1 E2 E3 E4 E5 E6 E7 E8 E9: library part CMP-00380-17, "Rf Connectors / Coaxial Connectors SMT Ml Rec Au 50 Ohm W/anti Sldr Wicking UFL", Dielectric Material=Polymer, Housing Color=Beige, JLC PN=C88374, Max Frequency=6GHz, Max Operating Temperature=90°C, Min Operating Temperature=-40°C, Package Quantity=100, Body Material=Bronze, Body Plating=Silver, Center Contact Plating=Gold, Connector Type="Receptacle,Male Pin", Contact Material=Brass, Contact Plating=Gold, Depth=3mm, Fastening Type=SNAP-ON, Impedance=50, Lead Free="Lead Free", Length=3.1mm, Mating Cycles=30, Mount="Surface Mount", Number of Ports=1, Orientation=Vertical, Packaging=Bulk, Radiation Hardening=No, RoHS Compliant=Yes, Series=U.FL, Source=Aliexpress, Termination=Solder
IC1 IC2: library part CMP-00897-1, "Operational Amplifier, 1 Func, 9000uV Offset-Max, 100MHz Band Width, CMOS, PDSO6", Case/Package=SOT-23-6, Input Bias Current=50pA, Input Offset Voltage (Vos)=9mV, JLC_PN=C2058090, Max Supply Voltage=5.5V, Min Supply Voltage=2.7V, Operating Supply Current=11mA, Output Current per Channel=60mA, Power Supply Rejection Ratio (PSRR)=88dB, Voltage Gain=10000, Common Mode Rejection Ratio=80dB, Gain Bandwidth Product=200MHz, Number of Channels=1, Quiescent Current=11mA, RoHS Compliant=Yes, Slew Rate=300V/µs, Source=JLCPCB(Extended,Economic_PCBA)
J1 J4 J5 J6 J7: library part CMP-00188-2, "Conn Unshrouded Header HDR 3 POS 2.54mm Solder ST Thru-Hole Poly Bag"
J2 J9: library part CMP-00157-4, "KK 254 Breakaway Header, Vertical, 2 Circuits, Tin (Sn) Plating, Mating Pin Length 6.09mm 2 POS", Color=Black, Contact Resistance=20mR, Current Rating=4A, Flammability Rating="UL94 V-0", Max Operating Temperature=75°C, Max Voltage Rating (AC)=250V, Min Operating Temperature=0°C, Package Quantity=1, Connector Type="Male Pin", Contact Material=Brass,Bronze, Contact Mating Length=0.24inch, Contact Plating=Tin, Contact Type="Male Pin", Depth=2.49mm, Gender=Male, Glow Wire Compliant=Non-compliant, Housing Color=Black, Housing Material=Nylon, Lead Free="Lead Free", Max Voltage Rating (DC)=250V, Mount="Through Hole", Mounting Technology="Through Hole", Number of Circuits=2, Number of Contacts=2, Number of Positions=2, Number of Rows=1, Orientation=Straight, Packaging=Bulk, Pitch=2.54mm, Radiation Hardening=No, REACH SVHC=Unknown, Series="KK® 42375", Termination=Solder, Voltage Rating=250V, Voltage Rating (DC)=250V
J3: library part CMP-00690-1, "Board Connector, 2 Contact(s), 1 Row(s), Male, Straight, 0.079 inch Pitch, Solder Terminal, Locking, Natural Insulator"
J8: library part CMP-00693-1, "Connector Header, PH Series, 3 Position, 2.00mm, Through Hole, Press-Fit, Solder, Natural", Flammability Rating="UL94 V-0", Insulation Color=Natural, Max Operating Temperature=85°C, Min Operating Temperature=-25°C, Voltage Rating=100V, Connector Type=Header, Contact Finish - Mating=TIN, Contact Material=Brass, Contact Mating Length=0.13inch, Contact Post Length=0.134inch, Contact Shape=Square, Contact Type="Male Pin", Fastening Type=Detent, Gender=Male, Insulation Height=0.236inch, Insulation Material=Nylon, Lead Free="Lead Free", Mated Stacking Heights=8mm, Material=Polyamide, Mounting Technology="Through Hole", Number of Positions=3, Number of Rows=1, Packaging=Bulk, Series=PH, Termination=Press-Fit, Voltage Rating (DC)=100V, Weight=28.349523g
JP1 JP5 JP8 JP10: library part CMP-009-00003-3, "JUMPER-0402 TWO STATE Fixed Resistor, Metal Glaze/thick Film, 0.1W, 0ohm, Surface Mount, 0402", Case Code (Imperial)=0402, JLC_PN=C17168, Power Rating=100mW, Tolerance=1%, RoHS Compliant=Yes, Source=JLCPCB(Basic)
JP2 JP3 JP4 JP6 JP7 JP11 JP12: library part CMP-009-00001-5, "0402 pad placeholder for 0-ohm resistor jumper", Case Code (Imperial)=0402, Tolerance=1%, RoHS Compliant=Unsure, Source=Distributor
JP9: library part CMP-00652-4, "Fixed Resistor, Metal Glaze/thick Film, 0.1W, 0ohm, Surface Mount, 0402", Case Code (Imperial)=0402, JLC_PN=C17168, Power Rating=100mW, Tolerance=1%, RoHS Compliant=Yes, Source=JLCPCB(Basic)
K1: library part CMP-00908-1, "General Purpose 3VDC SPDT Non Latching Through Hole Power Relays ROHS", Source=Aliexpress
L1: library part CMP-00916-1, "General Purpose Inductor, 47uH, 20%, 1 Element, SMD, 2320", Case Code (Imperial)=N/A, Current Rating=720mA, DC Resistance (DCR)=0.37, Saturation Current=1.1A, Test Frequency=1kHz, Tolerance=20%, Core Material=Ferrite, RoHS Compliant=Yes, Shielding=No, Source=UWAA_Stock
LD1: library part CMP-00026-00000-3, "VCSEL Emitter, 840nm Min, 860nm Max, 2500Mbps, TO-46, Through Hole Mount", Max Operating Temperature=70°C, Max Supply Voltage=2.2V, Min Operating Temperature=0°C, Min Supply Voltage=1.6V, Operating Wavelength-Max=860nm, Operating Wavelength-Min=840nm, Operating Wavelength-Nom=850nm, Package Style=TO-46Meter, Supply Current=15mA, Threshold Current-Min=3mA, Body Height=3.66mm, Body Length or Diameter=4.67mm, Built-in Feature="MONITOR PHOTODIODE", Data Rate=2500Mbps, Fall Time-Max=0.1ns, Fiber Optic Device Type="VCSEL EMITTER", Mounting Technology="Through Hole", Number of Channels=1, Reach SVHC Compliant=Yes, Rise Time=0.1ns, RoHS Compliant=Yes, Spectral Width=0.85nm, Transmission Type=Digital
Q1 Q2: library part CMP-00894-1, "RF Small Signal Bipolar Transistor, 0.1A I(C), 1-Element, Ultra High Frequency Band, Silicon, NPN", Case/Package=SOT-23, Collector Base Voltage (VCBO)=20V, Collector-emitter Voltage Max=12V, DC Current Gain-Min (hFE)=50, Emitter Base Voltage (VEBO)=3V, Frequency=7GHz, JLC_PN=C28646266, Max Collector Current=100mA, Max Power Dissipation=200mW, Polarity=NPN, RoHS Compliant=Yes, Source=JLCPCB(Basic)
Q3: library part CMP-00703-4, "4A 25mΩ@4.5V null SOT-23 MOSFETs ROHS N CHANNEL", Case/Package=SOT-23, Continuous Drain Current (ID)=4A, Drain to Source Voltage (Vdss)=20V, Gate to Source Voltage (Vgs)=12V, Input Capacitance=340pF, JLC_PN=C427390, Max Power Dissipation=1.25W, Threshold Voltage=1.2V, Rds On Max=28m, RoHS Compliant=Unsure, Source=JLCPCB(Basic), Type="N channel"
R1: library part CMP-077-000028-1, "125mW Thick Film Resistors 150V ±100ppm/℃ ±1% 75kΩ 0805 Chip Resistor - Surface Mount ROHS", Case Code (Imperial)=0805, JLC_PN=C17819, Power Rating=125mW, Temperature Coefficient=±100ppm/℃, Tolerance=1%, Voltage Rating=150V, RoHS Compliant=Yes, Source=JLCPCB(Basic)
R2: library part CMP-077-000027-1, "-55℃~+155℃ 125mW 150V 7.5kΩ Thick Film Resistor ±1% ±100ppm/℃ 0805 Chip Resistor - Surface Mount ROHS", Case Code (Imperial)=0805, JLC_PN=C17807, Power Rating=125mW, Temperature Coefficient=±100ppm/℃, Tolerance=1%, Voltage Rating=150V, RoHS Compliant=Yes, Source=JLCPCB(Basic)
R3 R4 R10: library part CMP-00586-3, "Res Trimmer 10K Ohm 25% 1/10W 1(Elec)/1(Mech)Turn (3 X 3.8mm) Foot Print SMD Embossed T/R", Case Code (Imperial)=0402, Power Rating=100mW, Temperature Coefficient=250ppm/°C, Tolerance=25%, RoHS Compliant=Unsure, Source=JLCPCB(Basic)
R5 R7 R16: library part CMP-00817-3, "Metal Glaze/thick Film, 0.0625W, 0ohm, 0402", Case Code (Imperial)=0402, JLC_PN=C17168, Tolerance=1%, RoHS Compliant=Unsure, Source=JLCPCB(Basic)
R6: library part CMP-00490-4, "Res Thick Film 0603 27 Ohm 5% 1/10W +/-200ppm/ßC Molded SMD Punched Carrier T/R", Case Code (Imperial)=0603, JLC_PN=C25190, Power Rating=100mW, Temperature Coefficient=200ppm/°C, Tolerance=5%, Voltage Rating=75V, RoHS Compliant=Yes, Source=JLCPCB(Basic)
R8 R12: library part CMP-00655-3, "Fixed Resistor, Metal Glaze/thick Film, 0.0625W, 100ohm, 50V, 1% +/-Tol, 100ppm/Cel, Surface Mount, 0402", Case Code (Imperial)=0402, JLC_PN=C25076, Tolerance=1%, RoHS Compliant=Yes, Source=JLCPCB(Basic)
R9 R14: library part CMP-077-000018-1, "62.5mW Thick Film Resistors 50V ±100ppm/℃ ±1% 49.9Ω 0402 Chip Resistor - Surface Mount ROHS", Case Code (Imperial)=0402, JLC_PN=C25120, Power Rating=62.5mW, Temperature Coefficient=200ppm/°C, Tolerance=1%, RoHS Compliant=Yes, Source=JLCPCB(Basic)
R11: library part CMP-077-000030-1, "Res Thick Film 0402 27K Ohm 1% 0.063W(1/16W) ±100ppm/C Pad SMD T/R", Case Code (Imperial)=0402, JLC_PN=C25771, Power Rating=62.5mW, Temperature Coefficient=100ppm/°C, Tolerance=1%, Voltage Rating=50V, RoHS Compliant=Unsure, Source=JLCPCB(Basic)
R13: library part CMP-077-000031-1, "62.5mW Thick Film Resistors 50V ±100ppm/℃ ±1% 5.6kΩ 0402 Chip Resistor - Surface Mount ROHS", Case Code (Imperial)=0402, JLC_PN=C25908, Power Rating=62.5mW, Temperature Coefficient=100ppm/°C, Tolerance=1%, Voltage Rating=50V, RoHS Compliant=Unsure, Source=JLCPCB(Basic)
R15: library part CMP-077-000029-1, "Res Thick Film 0603 20 Ohm 1% 0.1W(1/10W) ±200ppm/C Pad SMD T/R", Case Code (Imperial)=0603, JLC_PN=C22950, Power Rating=100mW, Temperature Coefficient=100ppm/℃, Tolerance=1%, Voltage Rating=75V, RoHS Compliant=Yes, Source=JLCPCB(Basic)
R17: library part CMP-00319-8, "Fixed Resistor, Metal Glaze/thick Film, 0.0625W, 1000000ohm, 50V, 1% +/-Tol, 100ppm/Cel, Surface Mount, 0402", Case Code (Imperial)=0402, JLC_PN=C26083, Power Rating=62.5mW, Temperature Coefficient=-100100ppm/°C, Tolerance=1%, RoHS Compliant=Yes, Source=JLCPCB(Basic)
R18: library part CMP-00657-3, "RESISTOR, 0402 1% 5K1; Power Rating: 0.0625W; Resistance: 5.1kohm; Tolerance, Resistance: ± 1%; Series: MC;...", Case Code (Imperial)=0402, JLC_PN=C25905, Tolerance=1%, RoHS Compliant=Unsure, Source=JLCPCB(Basic)
R19 R20 R25: library part CMP-00098-5, "RES 1K OHM 1% 1/16W 0402", Case Code (Imperial)=0402, JLC_PN=C11702, Power Rating=62.5mW, Temperature Coefficient=100ppm/°C, Tolerance=1%, RoHS Compliant=Unsure, Source=JLCPCB(Basic)
R21: library part CMP-00515-7, "Res Thick Film 0402 10K Ohm 1% 1/16W ±100ppm/°C Molded SMD Paper T/R", Case Code (Imperial)=0402, JLC_PN=C25744, Power Rating=63mW, Temperature Coefficient=100ppm/°C, Tolerance=1%, Voltage Rating=50V, RoHS Compliant=Unsure, Source=JLCPCB(Basic)
R22 R26: library part CMP-00094-5, "RES 100K OHM 1% 1/16W 0402", Case Code (Imperial)=0402, JLC_PN=C25741, Power Rating=62.5mW, Temperature Coefficient=100ppm/°C, Tolerance=1%, RoHS Compliant=Unsure, Source=JLCPCB(Basic)
R23: library part CMP-077-000023-1, "Thick Film Resistors - SMD RMC 0805 1/8W 1% T/R-5000", Case Code (Imperial)=0402, JLC_PN=C17470, Power Rating=125mW, Tolerance=1%, Voltage Rating=150V, RoHS Compliant=Unsure, Source=JLCPCB(Basic)
R24: library part CMP-077-000024-1, "Res Thick Film 0805 10K Ohm 1% 0.125W(1/8W) ±100ppm/C Pad SMD T/R", Case Code (Imperial)=0805, JLC_PN=C17414, Power Rating=125mW, Tolerance=1%, Voltage Rating=150V, RoHS Compliant=Unsure, Source=JLCPCB(Basic)
SW1: library part CMP-00120-1, "C & K COMPONENTS - PCM12SMTR - SWITCH, SPDT, 0.3A, 6VDC, SMD", Contact Current Rating=300mA, Contact Resistance=70mR, Insulation Resistance=100mR, Max Operating Temperature=85°C, Max Voltage Rating (DC)=6V, Min Operating Temperature=-20°C, Package Quantity=1, Actuator Length=1.5mm, Actuator Material=Nylon,Polyamide, Actuator Type=Standard, Contact Material="Copper Alloy,Copper,Silver", Contact Plating=Silver, Current Rating=300mA, Depth=5mm, Lead Free="Lead Free", Length=7.7mm, Max Current Rating=300mA, Mechanical Life=10000Cycles, Mount="Surface Mount", Orientation="Right Angle", Packaging="Tape and Reel", REACH SVHC="No SVHC", Switch Function=On-On, Switch Travel=1.5mm, Termination="Gull Wing", Throw Configuration=SPDT, Voltage Rating (AC)=6V, Voltage Rating (DC)=6V, Width=6.7mm
TP1 TP2 TP3 TP4 TP5 TP6: library part CMP-00397-1
U1: library part CMP-071-000018-2, "2.5-V, 2: 1 (SPDT), 1-channel general-purpose analog switch 8-VSSOP -40 to 85", Case/Package=VSSOP, High Level Output Current=50mA, Max Supply Current=10µA, Max Supply Voltage=2.7V, Min Supply Voltage=800mV, Bandwidth=198MHz, Height=900µm, Length=2.3mm, Low Level Output Current=50mA, Mount="Surface Mount", Number of Bits=2, Number of Channels=2, Number of Circuits=1, Number of Inputs=2, Number of Pins=8, Operating Supply Current=10µA, Propagation Delay=100ps, Radiation Hardening=No, RoHS=Compliant, Source=Distributor, Supply Type=Single, Thickness=850µm, Throw Configuration=SPDT, Turn-Off Delay Time=10ns, Turn-On Delay Time=9.2ns
U2: library part CMP-071-000015-1, "Single 1.65-V to 5.5-V inverter with Schmitt-Trigger inputs 5-SOT-23 -40 to 125", Case/Package=SOT-23, High Level Output Current=-32mA, JLC_PN=C7835, Low Level Output Current=32mA, Manufacturer Lifecycle Status=ACTIVE, Max Junction Temperature (Tj)=150°C, Max Operating Temperature=125°C, Max Supply Voltage=5.5V, Min Operating Temperature=-40°C, Min Supply Voltage=1.65V, Quiescent Current=10µA, Contact Plating=Tin, Height=1.45mm, Lead Free="Lead Free", Length=2.9mm, Lifecycle Status=Production, Logic Function=Inverting, Max Output current=32mA, Mounting Technology="Surface Mount", Number of Bits=1, Number of Channels=1, Number of Circuits=1, Number of Elements=1, Number of Gates=1, Number of Inputs=1, Number of Outputs=1, Output Current=32mA, Packaging="Cut Tape", Pins=5, Propagation Delay=11ns, Radiation Hardening=No, REACH SVHC=No, RoHS=Compliant, Schedule B="8542390000, 8542390000", Termination=SMD/SMT, Thickness=1.2mm, Turn-On Delay Time=11ns, Weight=15.790684mg, Width=1.6mm
U3: library part CMP-00672-1, "Conv DC-DC 1.8V to 6V Step Up Single-Out 1.8V to 28V 0.4A 5-Pin SOT-23 T/R", Case/Package=SOT-23-5, Current Rating=28mA, Frequency=1MHz, High Level Output Current=90mA, JLC_PN=C7722, Max Operating Temperature=85°C, Max Output Voltage=28V, Max Supply Current=50uA, Max Supply Voltage=6V, Min Input Voltage=1.8V, Min Operating Temperature=-40°C, Operating Frequency="1 MHz", Output Current=400mA, Output Current per Channel=350mA, Output Power=357mW, Package Quantity=3000, Quiescent Current=28uA, Dimming=PWM, Efficiency=86%, Lead Free="Lead Free", Max Output current=90mA, Min Output Voltage=1.8V, Min Supply Voltage=1.8V, Number of Channels=1, Number of Outputs=1, Output Type=Adjustable, Output Voltage=28V, Packaging="Tape and Reel", Pins=5, Radiation Hardening=No, Reach SVHC Compliant=No, RoHS Compliant=Yes, Series=-, Switching Frequency=1MHz, Termination=SMD/SMT, Thickness=1.2mm, Topology=Boost, Weight=0.000459oz, Width=1.6mm
U4: library part CMP-00909-1, "2.5-ns high-speed rail-to-rail comparator with push-pull outputs 5-SC70 -40 to 125", JLC_PN=C2974371, Manufacturer Lifecycle Status=ACTIVE, Height=1.1mm, Length=2mm, Lifecycle Status=Production, Number of Channels=1, Pins=5, RoHS=Compliant, RoHS Compliant=Unsure, Thickness=900µm, Width=1.25mm
U5: library part CMP-00906-1, "\"240-MHZ, Single-ended, Transimpe\" Transimpedance Amplifier IC SOT-563", JLC_PN=C19723951, Manufacturer Lifecycle Status=ACTIVE, Height=600µm, Length=1.6mm, Lifecycle Status=Production, Pins=6, RoHS=Compliant, Thickness=550µm, Width=1.2mm
U6: library part CMP-001-0007-3, "Gull Wing EAR99 Fixed Positive Single Output Ldo Regulator Dual Voltage Regulator Linear 125C 1.2W 1A 1.8MM", Case/Package=SOT-223, Dropout Voltage=1.1V, JLC_PN=C6186, Max Operating Temperature=125°C, Max Power Dissipation=1.2W, Max Supply Voltage=15V, Min Operating Temperature=-40°C, Nominal Supply Current=5mA, Output Current=1A, Output Voltage=3.3V, Height=1.8mm, Number of Outputs=1, Pins=2, RoHS Compliant=Yes, Source=JLCPCB(Basic)
U7: library part CMP-077-000020-1, "LDO Voltage Regulator, Fixed, 1.7V to 5.5V, Single Output, 170mV, 2.7V, 300mA, 5 Pins, TSOP", Case/Package=SOT-23-5, Dropout Voltage=135mV, Max Input Voltage=5.5V, Max Output Voltage=2.7V, Max Power Dissipation=250mW, Min Input Voltage=3.2V, Output Current=300mA, Power Supply Rejection Ratio (PSRR)=40dB, Accuracy=1%, Min Output Voltage=2.7V, Number of Regulators=1, Output Type=Fixed, Output Voltage=2.7V, Polarity=Positive, RoHS=Compliant, RoHS Compliant=Unsure, Source=Distributor

## Nets (pads, with @x,y where several pads share a name; then routed paths per layer and width w, separated by ;. In a path a pad name is that pad's centre, name@x,y a point inside that pad or via, vN(x,y) a via of type N, cw(c..) or ccw(c..) an arc to the next point about the centre after c; other vN are vias at no path point)
2V7: C1.2 C2.2 C13.2 IC1.5 IC1.6 IC2.5 IC2.6 J1.2 J6.2 R20.2 U7.5
3V3: C5.2 C6.2 C8.2 C11.2 C14.2 J4.3 J7.3 JP10.2 K1.COIL2 R10.3 R11.2 R19.2 R25.2 U1.8 U2.5 U4.5 U5.2 U6.2 U6.4
+13V: C15.2 C16.2 D4.1 J5.3 R17.1 R21.2 TP3.1
-13V: C18.2 D12.2 J5.1 TP5.1
GND: C1.1 C2.1 C4.1 C5.1 C6.1 C7.1 C8.1 C9.1 C10.1 C11.1 C12.1 C13.1 C14.1 C16.1 C18.1 C19.1 D1.2 D2.2 D3.2 D5.1 D6.1 D8.1 D9.2 D10.2 D11.1 D13.1 D15.2 D16.2 D17.2 E1.2 E3.2 E4.2 E5.2 E6.2 E7.2 E8.2 IC1.2 IC2.2 J4.1 J7.1 JP2.1 JP3.1 JP4.1 JP6.1 JP7.1 Q3.2 R3.1 R4.1 R6.1 R8.1 R9.1 R10.1 R12.1 R13.1 R22.2 R26.1 U1.2 U1.3 U1.4 U1.7 U2.3 U3.2 U4.2 U5.5 U6.1 U7.2
INPUT: E7.1 JP3.2 R7.2
LD_A: C9.2 C10.2 C12.2 D16.1 E9.2 J2.2 J8.2 K1.COM K1.NO L1.1 LD1.2 R18.2 SW1.2 U3.4 U3.5 U6.3 U7.1 U7.3
LD_K: D17.1 E9.1 J8.3 K1.NC LD1.1 Q1.1 Q2.1
MODSIG: C3.2 E1.1 IC2.3 R5.1
NetC3_1: C3.1 JP2.2
NetC4_2: C4.2 JP1.3 TP1.1 U1.6
NetC7_2: C7.2 JP5.3 TP2.1 U4.4
NetC15_1: C15.1 R17.2 R22.1 U3.3
NetC17_1: C17.1 D12.1 D13.2
NetC17_2: C17.2 D4.2 L1.2 U3.1
NetC19_2: C19.2 IC1.3 JP8.3 TP6.1
NetD1_1: D1.1 JP8.2 R3.2
NetD2_1: D2.1 JP1.2 R4.2
NetD5_2: D5.2 R18.1
NetD6_2: D6.2 R19.1
NetD7_1: D7.1 E2.1 J3.2 U5.1
NetD8_2: D8.2 R20.1
NetD9_1: D9.1 J2.1 J9.2 SW1.3
NetD10_1: D10.1 J9.1 R8.2
NetD11_2: D11.2 R21.1
NetD14_1: D14.1 JP9.1 Q3.3
NetD14_2: D14.2 R25.1
NetE3_1: E3.1 JP12.1
NetE4_1: E4.1 IC2.4 Q2.3 R12.2
NetE5_1: E5.1 JP11.1
NetE8_1: E8.1 IC1.4 Q1.3 R6.2
NetIC1_1: IC1.1 Q1.2
NetIC2_1: IC2.1 Q2.2
NetJ4_2: J4.2 U5.6
NetJ7_2: J7.2 U5.3
NetJP4_2: JP4.2 R7.1 R9.2 U1.5
NetJP5_1: JP5.1 R10.2
NetJP5_2: JP5.2 R11.1 R13.2
NetJP6_2: JP6.2 R15.2 R16.2
NetJP9_2: JP9.2 K1.COIL1
NetJP10_3: JP10.3 Q3.1 R26.2
NetJP11_2: JP11.2 R14.2 U2.2
NetJP12_2: JP12.2 U4.3 U5.4
NetR1_1: R1.1 R2.1 R4.3
NetR3_3: R3.3 R23.1 R24.1
NetR5_2: R5.2 U1.1
NetR14_1: R14.1 U4.1
NetR15_1: R15.1 U2.4
OUTPUT: E6.1 JP7.2 R16.1
PD_A: D15.1 J8.1 LD1.3
PD_BIAS: D3.1 D7.2 E2.2 J3.1 J5.2 TP4.1
SEL_3mA: J1.1 R1.2
SEL_20mA: J1.3 R2.2
SEL_IR: J6.1 R23.2
SEL_RED: J6.3 R24.2
SET_BIAS: JP8.1
SET_MOD: JP1.1
UNSHORT: JP10.1
pads on no net: SW1.0 SW1.1 U2.1 U7.4

## Polygon pours and split planes (outlines as drawn)
GND on Top Layer "GND_L01_P000" (solid, pour order 0): 25.4,127 177.8,127 177.8,25.4 25.4,25.4

## Keep-outs
Keep-Out Layer:
  the board outline again, w0.6